# EAGLE board V0p2_Main_PCB2 (EAGLE 7.1.0)
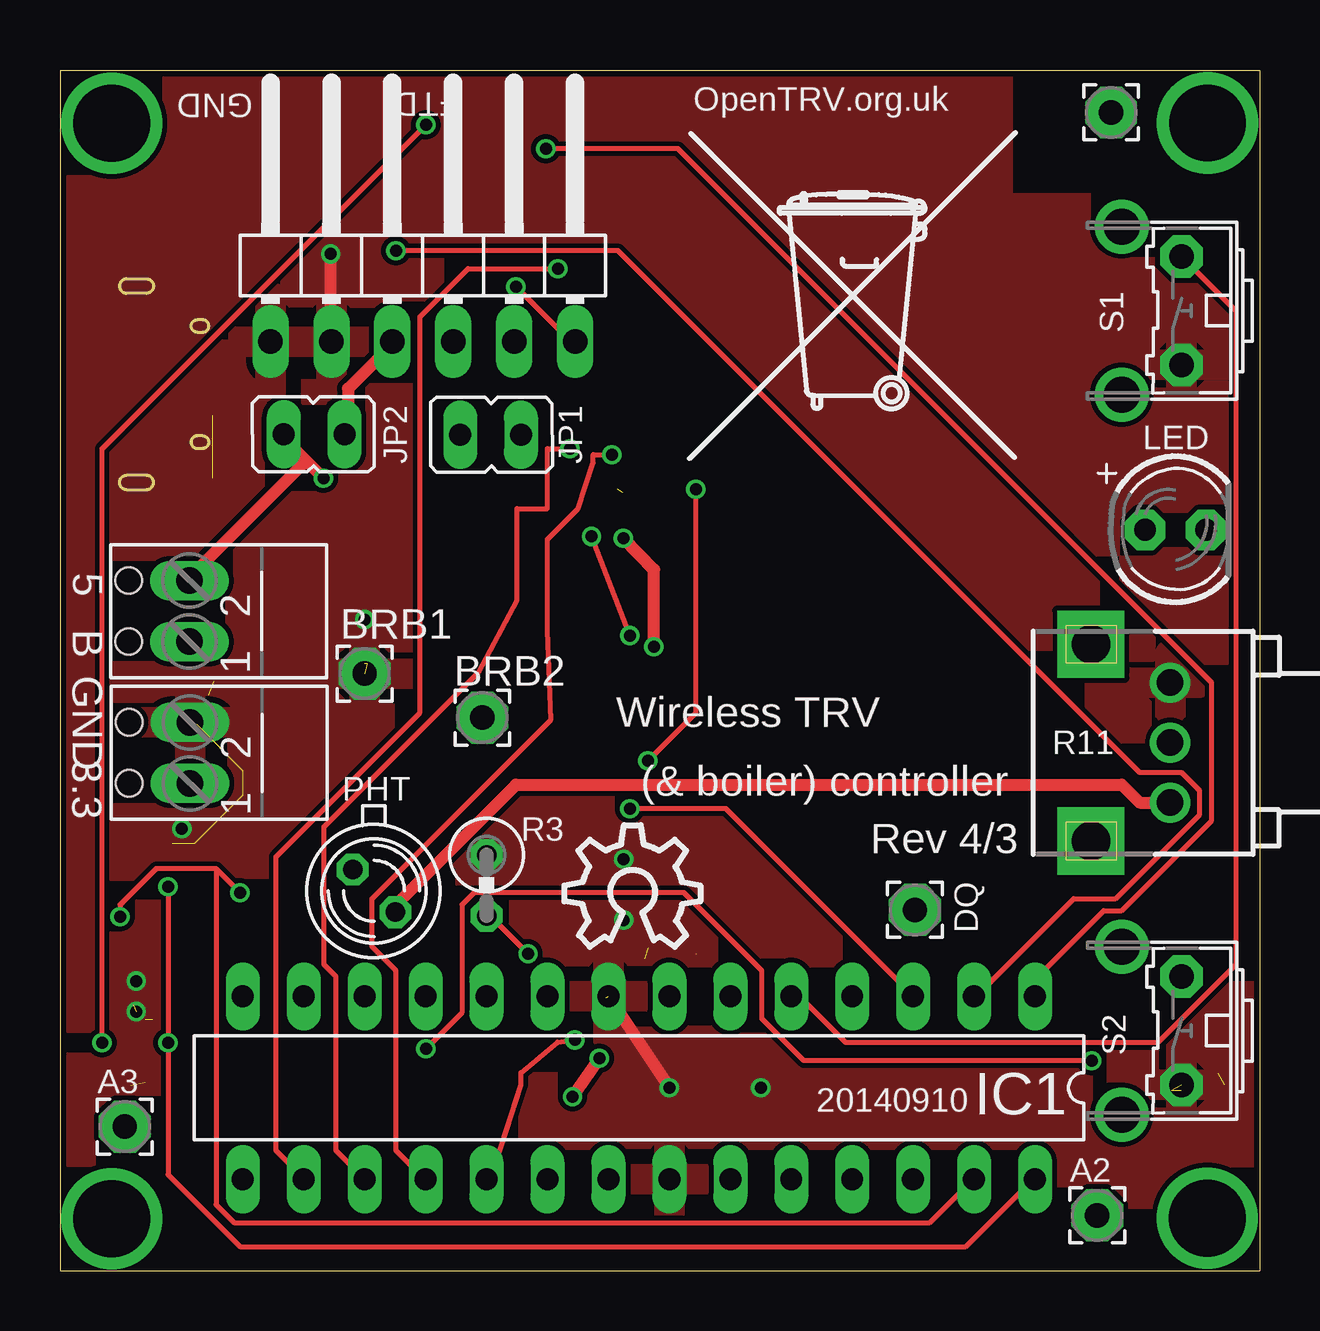
[diagram p0: board, top side]
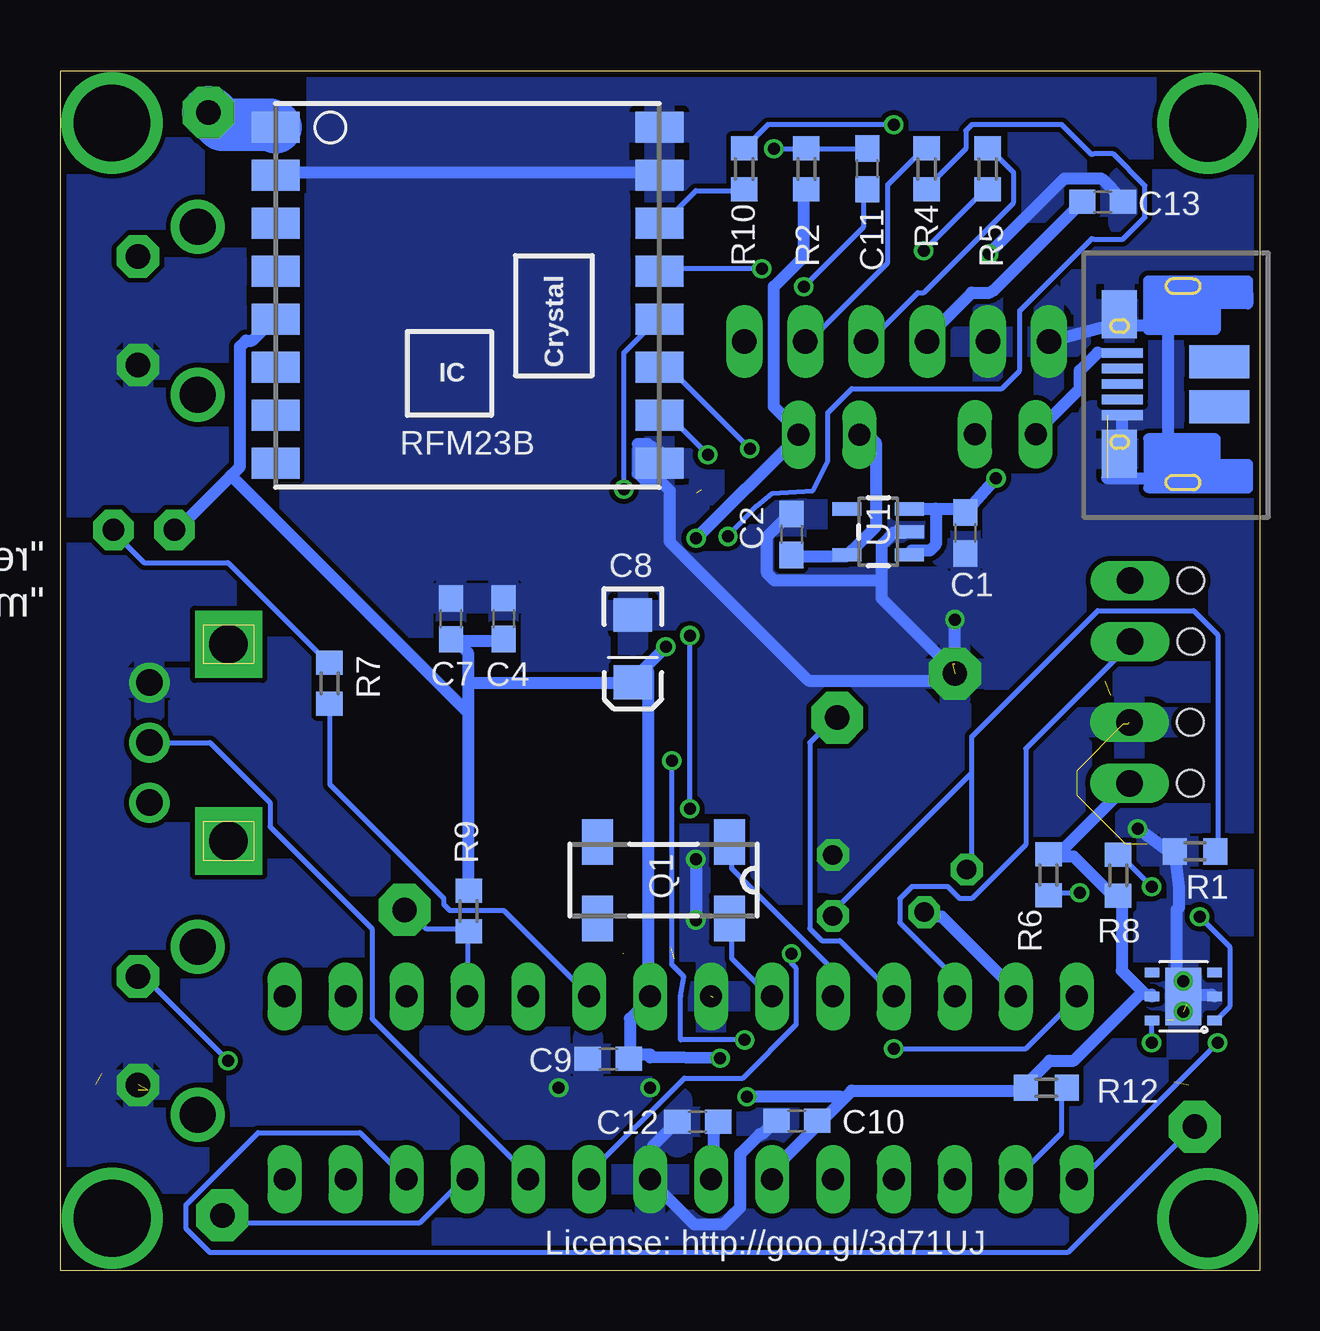
[diagram p1: board, bottom side, seen from below]

Size 50 x 50 mm. Coordinates in mm from the lower left corner, seen from the top.
Outline: 0,0 50,0 50,50 0,50 0,0
Copper layers (1*16): Top 0.035mm / dielectric 1.5mm / Bottom 0.035mm
Design rules "PMServicesStd *": minimum track width 8mil, minimum drill 0.5mm, track to track 8mil, track to pad 8mil, pad to pad 8mil, via to via 8mil, smd to smd 0mil, copper to edge 10mil, drill to drill 10mil, minimum pad ring 10mil, minimum via ring 6mil, stop-mask expansion 2mil, vias tented up to drill 100mil, thermal gap 10mil
Net classes: 0 default: width 0.203 mm; 1 supply: width 0.5 mm, clearance 0.203 mm; 2 ant: width 2.184 mm

## Footprints (pad centres in the part's own frame; a part is rotated, then mirrored left to right if it is on the bottom)
2,15/1,0 = drill 1.016 pad 2.159 octagon: 1 0,0
C0603 = smd 1.1 x 1: 1 -0.85,0; 2 0.85,0
EIA3216 = smd 1.4 x 1.6: A 1.4,0; C -1.4,0
1X06/90 = drill 1.016 long: 1 -6.35,-3.81; 2 -3.81,-3.81; 3 -1.27,-3.81; 4 1.27,-3.81; 5 3.81,-3.81; 6 6.35,-3.81
DIL28-3 = drill 0.914 long: 1 -16.51,-3.81; 2 -13.97,-3.81; 3 -11.43,-3.81; 4 -8.89,-3.81; 5 -6.35,-3.81; 6 -3.81,-3.81; 7 -1.27,-3.81; 8 1.27,-3.81; 9 3.81,-3.81; 10 6.35,-3.81; 11 8.89,-3.81; 12 11.43,-3.81; 13 13.97,-3.81; 14 16.51,-3.81; 15 16.51,3.81; 16 13.97,3.81; 17 11.43,3.81; 18 8.89,3.81; 19 6.35,3.81; 20 3.81,3.81; 21 1.27,3.81; 22 -1.27,3.81; 23 -3.81,3.81; 24 -6.35,3.81; 25 -8.89,3.81; 26 -11.43,3.81; 27 -13.97,3.81; 28 -16.51,3.81
JP1 = drill 0.914 long: 1 0,-1.27; 2 0,1.27
LED3MM = drill 0.914 pad 1.676 octagon: A -1.27,0; K 1.27,0
BPX65 = drill 0.813 octagon: A -0.889,-0.889; K 0.889,0.889
MC-306 = smd 1.3 x 1.9: 1 -2.75,-1.6; 2 2.75,-1.6; 3 2.75,1.6; 4 -2.75,1.6
R0603 = smd 1 x 1.1: 1 -0.85,0; 2 0.85,0
0309V = drill 0.813 octagon: 1 -1.27,0; 2 1.27,0
EVUE = drill 1.1 pad 1.676: 1 0,-2.5; 2 0,0; 3 0,2.5 | drill 1.6 pad 2.8 square: M1 -3.3,4.1; M2 -3.3,-4.1
RFM23-XXX-S1 = smd 2 x 1.3: 1 -8,7; 2 -8,5; 3 -8,3; 4 -8,1; 5 -8,-1; 6 -8,-3; 7 -8,-5; 8 -8,-7; 9 8,-7; 10 8,-5; 11 8,-3; 12 8,-1; 13 8,1; 14 8,3; 15 8,5; 16 8,7
B3F-31XX = drill 1.016 pad 1.778 octagon: 1 -2.261,-1.245; 2 2.261,-1.245 | drill 1.499 pad 2.032: 3 -3.505,1.245; 4 3.505,1.245
TC1185 = smd 0.55 x 1.2: 1 -0.95,-1.3; 2 0,-1.3; 3 0.95,-1.3; 4 0.95,1.3; 5 -0.95,1.3
SHT21 = smd 0.4 x 0.6: 1 -1,-1.3; 2 0,-1.3; 3 1,-1.3; 4 1,1.3; 5 0,1.3; 6 -1,1.3 | smd 2.4 x 1.5: P$1 0,0
MICRO-USB-FCI-10103592 = smd 0.4 x 1.71: 1 3.84,2.51; 2 3.19,2.51; 3 2.54,2.51; 4 1.89,2.51; 5 1.24,2.51 | smd 2 x 1.46: 7 -0.36,2.64; 17 5.44,2.64 | smd 1.375 x 2.5: 11 1.603,-1.52; 12 3.478,-1.52
SCREWTERMINAL = drill 1.1 long: 1 -1.27,-1.27; 2 1.27,-1.27 | hole 1.1: -1.27,1.27; 1.27,1.27

## Placement (x,y rotation side)
A2  [2,15/1,0]  43.23,2.31 0 top
A3  [2,15/1,0]  2.7,6 0 top
ANT1  ANT (86 mm)  [2,15/1,0]  43.81,48.26 0 top
BRB1  BRB1  [2,15/1,0]  12.7,24.87 0 top
BRB2  BRB2  [2,15/1,0]  17.6,23.04 180 top
C1  10uF 10V  [C0603]  12.27,30.74 270 bottom
C2  10uF 10V  [C0603]  19.51,30.68 270 bottom
C4  100pF  [C0603]  31.51,27.17 270 bottom
C7  100nF  [C0603]  33.7,27.16 90 bottom
C8  100uF  [EIA3216]  26.12,25.92 270 bottom
C9  100nF  [C0603]  27.15,8.82 180 bottom
C10  100nF  [C0603]  19.28,6.24 180 bottom
C11  100nF  [C0603]  16.35,45.91 270 bottom
C12  100nF  [C0603]  23.42,6.21 180 bottom
C13  10uF 10V  [C0603]  6.54,44.54 180 bottom
DQ  [2,15/1,0]  35.64,15.03 0 top
FTDI  [1X06/90]  15.12,42.52 0 top
IC1  ATmega328P-PU  [DIL28-3]  24.13,7.62 180 top
JP1  [JP1]  17.95,34.83 270 top
JP2  [JP1]  10.59,34.85 90 top
LED  [LED3MM]  46.5,30.86 0 top
PHT  BPX65  [BPX65]  13.09,15.82 270 top
Q1  32768Hz  [MC-306]  24.84,16.27 180 bottom
R1  220K  [R0603]  2.68,17.47 180 bottom
R2  4.7K  [R0603]  18.89,45.91 90 bottom
R3  [0309V]  17.78,16.05 270 top
R4  4.7K  [R0603]  13.87,45.91 90 bottom
R5  4.7K  [R0603]  11.33,45.91 90 bottom
R6  4.7K  [R0603]  8.79,16.49 270 bottom
R7  470R  [R0603]  38.77,24.47 90 bottom
R8  4.7K  [R0603]  5.89,16.47 270 bottom
R9  4.7K  [R0603]  32.96,14.99 90 bottom
R10  1K  [R0603]  21.48,45.91 270 bottom
R11  EVUE2A  [EVUE]  46.27,22 0 top
R12  4.7K  [R0603]  8.89,7.62 180 bottom
RFM23B  RFM23B  [RFM23-XXX-S1]  33.02,40.64 0 bottom
S1  [B3F-31XX]  45.5,40 90 top
S2  [B3F-31XX]  45.5,10 90 top
U1  TC1185SMD  [TC1185]  15.89,30.79 90 bottom
U$1  [OSHW_10X200_NOTEXT]  21.02,13.49 0 top
U$2  [TONNE]  32.88,37.88 0 top
U$4  SHT21  [SHT21]  3.17,11.43 90 bottom
USBPOWER  MICRO-USB-FCI-10103592  [MICRO-USB-FCI-10103592]  3.2,34.4 90 bottom
X1  [SCREWTERMINAL]  4.13,27.48 90 top
X2  [SCREWTERMINAL]  4.15,21.57 90 top

## Library data of the parts
A2 A3 ANT1 BRB1 BRB2 DQ = wirepad
C1 C2 C4 C7 C9-C13 R1-R10 R12 = resistor
C8 = SparkFun-Passives
FTDI = pinhead
IC1 = Arduino-AVR
JP1 JP2 = jumper
LED S1 S2 = adafruit
PHT = opto-trans-siemens; MPN: BPX65.; OC_FARNELL: 327451; OC_NEWARK: 06WX2764
Q1 = crystal; MPN: MC-306 60.0KHZ 100PPM ,12.5PF; OC_FARNELL: 1278040; OC_NEWARK: 31M5576
R11 = pot
RFM23B = SparkFun-RF
U1 = 3.3VREG
U$1 = ohw-logo
U$2 = logo
U$4 = SHT21
USBPOWER = micro-usb-fci-10103592
X1 X2 = screwterminal; MPN: 237-102; OC_FARNELL: unknown; OC_NEWARK: 70K9898

## Nets
5V [supply]: C1.1 JP2.2 U1.1 U1.3 USBPOWER.1 X1.2
AI1: IC1.24 R11.2
BOILER: IC1.12 X1.1
BUTTON_LEARN2_L: IC1.5 S1.2
BUTTON_LEARN_L: IC1.14 S2.2
BUTTON_MODE_L: BRB2.1 IC1.11
D2: DQ.1 IC1.4 R9.1
GND [supply]: BRB1.1 C1.2 C2.1 C4.1 C7.2 C8.C C9.2 C10.2 C12.2 C13.1 FTDI.1 FTDI.2 IC1.8 IC1.22 R1.2 R3.1 R11.3 RFM23B.2 RFM23B.9 RFM23B.15 RFM23B.16 S1.1 S2.1 U1.2 U$4.2 U$4.P$1 USBPOWER.5 USBPOWER.7 USBPOWER.17 X2.2
IO_POWER_UP [supply]: IC1.13 PHT.K R11.1
LDR: IC1.23 PHT.A R1.1 R3.2
LED_HEATCALL_L: IC1.6 R7.1
N$1: C11.2 FTDI.6
N$3: FTDI.4 R5.2
N$5: FTDI.5 R4.2
N$6 [supply]: C12.1 IC1.21
N$7: R10.2 RFM23B.14
N$8 [supply]: C2.2 JP1.1 U1.5
N$11 [supply]: C13.2 FTDI.3 JP2.1
N$13: LED.K R7.2
N$24: A2.1 IC1.25
N$25: A3.1 IC1.26
N$31 [ant]: ANT1.1 RFM23B.1
RESET: C11.1 IC1.1 R2.2
RFM_IRQ: IC1.15 R10.1
RX: IC1.3 R4.1
SCL: IC1.28 R8.1 U$4.6
SDA: IC1.27 R6.2 U$4.1
SPI_MISO: IC1.18 RFM23B.10
SPI_MOSI: IC1.17 RFM23B.11
SPI_NSS: IC1.16 R12.1 RFM23B.13
SPI_SCK: IC1.19 RFM23B.12
TX: IC1.2 R5.1
VCC [supply]: C4.2 C7.1 C8.A C9.1 C10.1 IC1.7 IC1.20 JP1.2 LED.A R2.1 R6.1 R8.2 R9.2 R12.2 RFM23B.5 U$4.5 X2.1
XTAL1: IC1.9 Q1.4
XTAL2: IC1.10 Q1.1

## Tracks (layer width: path | path; a pad name or v marks a point on that pad's centre or on a via)
5V  (via drill 0.5)
  Top 0.5: 10.25,33.75 9.25,34.75 JP2.2 | 10.25,33.75 v10.98,33.02 | 10.25,33.75 5.5,29 X1.2
  Bottom 0.4: 6.75,38.25 5.75,38.25 USBPOWER.1
  Bottom 0.5: 13.5,31.75 14.5,31.75 U1.3 | 13.5,31.75 12.5,31.75 C1.1 v10.98,33.02 | 13.5,31.75 13.5,30.25 13.75,30 14.5,30 U1.1 | 6.75,38.25 7.5,37.5 7.5,36.75 9.25,35 JP2.2
AI1
  Bottom 0.203: R11.2 43.75,22 41.25,19.5 41.25,18.5 37,14.25 37,10.5 30.5,4 IC1.24
BOILER
  Bottom 0.203: IC1.12 12.75,11.5 12.75,12.25 15,14.5 15,15.5 14.5,16 13,16 12.5,15.5 12,15.5 9.75,17.75 9.75,21.75 5.5,26 X1.1
BUTTON_LEARN2_L
  Top 0.203: IC1.5 30.5,11.25 31,11.25 32.75,9.5 45.75,9.5 49,12.75 49,40 S1.2
BUTTON_LEARN_L  (via drill 0.5)
  Top 0.203: v15.25,9.25 16.75,10.75 16.75,15.25 17.25,15.75 26,15.75 29.25,12.5 29.25,10.5 31,8.75 v43,8.75
  Bottom 0.203: v15.25,9.25 9.75,9.25 7.75,11.25 IC1.14 | v43,8.75 46.5,12.25 S2.2
BUTTON_MODE_L
  Bottom 0.203: IC1.11 15.25,11.5 17.5,13.75 18.25,13.75 18.75,14.25 18.75,22 17.75,23 BRB2.1
D2
  Bottom 0.203: IC1.4 33,11.5 33,14 R9.1 33,14.25 34.75,14.25 35.5,15 DQ.1
GND  (via drill 0.5)  (21 unrouted)
  Top 0.5: 25.3,7.72 25.33,7.75 | v11.28,42.37 11.28,38.71 FTDI.2 | 22.86,11.48 IC1.8 | 22.86,11.79 IC1.8 | IC1.8 v25.4,7.62
  Bottom 0.4: 5.75,35.5 USBPOWER.5
  Bottom 0.406: USBPOWER.5 6.35,35.64
  Bottom 0.5: 41.25,45.75 RFM23B.2 41,45.75 25.25,45.75 RFM23B.15 | U$4.2 2,11.5 3,11.5 U$4.P$1 | 5.75,35.5 5.75,34.25 USBPOWER.7 | 15.75,28.75 15.75,28 12.75,25 BRB1.1 | 15.75,28.75 15.75,30.25 15.25,30.75 14.75,30.75 U1.2 | 6.35,33.02 3.81,33.02 3.81,39.37 5.84,39.37 | 5.84,39.37 USBPOWER.17 | C10.2 20.22,6.2 20.73,5.69 20.83,5.69 21.64,4.88 21.64,2.64 22.35,1.93 23.57,1.93 25.4,3.76 IC1.22 25.3,3.96 25.3,5.18 24.28,6.2 C12.2 | 15.75,28.75 20.22,28.75 20.52,29.06 20.52,30.58 19.61,31.5 C2.1 | v11.28,42.37 8.13,45.52 6.6,45.52 5.69,44.6 C13.1 | 5.84,39.37 6.23,39.37 FTDI.1 | U$4.P$1 3.25,12.09 3.45,12.29 3.45,15.04 3.35,15.14 3.35,15.95 R1.2 3.81,17.47 v5.08,18.41 | v12.7,27.13 12.7,25.4 12.39,25.09 12.39,24.79 12.6,24.59 18.8,24.59 24.59,30.38 24.59,32.51 24.99,32.92 25.6,32.92 25.91,33.22 25.91,34.44 25.5,34.44 25.02,34.15 | 3.15,11.48 U$4.P$1 | v23.5,17.14 v23.5,14.61 | 25.09,33.63 RFM23B.9 25.09,33.63
  other vias: 3.17,10.79 3.17,12.06 29.21,7.62
  pour Bottom: 0,0 50,0 50,50 44.6,50 44.6,44.28 39.09,44.27 39.09,50 0,50
  pour Top: 0,50 0,0 50,0 50,50 44.6,50 44.6,44.28 39.09,44.27 39.09,50
IO_POWER_UP
  Top 0.5: R11.1 45,19.5 44.25,20.25 19,20.25 13.75,15 PHT.K
  Bottom 0.5: PHT.K 13.75,14.75 13.25,14.75 10,11.5 IC1.13
LDR  (via drill 0.5)
  Top 0.203: v19.51,13.21 18.29,14.43 18.19,14.43 17.88,14.73 R3.2
  Bottom 0.203: 12,20.75 12,16.75 PHT.A | 12,20.75 12,22.25 6.75,27.5 2.75,27.5 1.75,26.5 1.75,17.68 1.98,17.68 R1.1 | 12,20.75 17.75,15 R3.2 | v19.51,13.21 19.51,12.8 19.3,12.6 19.3,10.26 21.54,8.03 23.98,8.03 27.94,4.06 IC1.23
LED_HEATCALL_L
  Bottom 0.203: R7.1 38.75,23.5 38.75,20.25 34,15.5 34,15.25 33.75,15 31.5,15 28,11.5 IC1.6
N$1  (via drill 0.5)
  Top 0.203: v19,41 21.25,38.75 FTDI.6
  Bottom 0.203: v19,41 16.5,43.5 16.5,45 C11.2
N$3
  Bottom 0.203: R5.2 11.25,46.75 10.25,45.75 10.25,44.5 14,40.75 14.25,40.75 16.25,38.75 FTDI.4
N$4  (via drill 3.2)
  other vias: 2.16,47.81
N$5
  Bottom 0.203: R4.2 14,46.75 15.5,45.25 15.5,42 18.75,38.75 FTDI.5
N$6
  Bottom 0.5: C12.1 22.75,6 22.75,4 IC1.21
N$7
  Bottom 0.203: R10.2 21.5,45 23.5,45 25,43.5 RFM23B.14
N$8
  Bottom 0.5: C2.2 19.5,29.75 17.25,29.75 U1.5 17,30 16,31 16,34.5 16.5,35 JP1.1
N$11
  Top 0.5: JP2.1 12,35 12,36.75 13.75,38.5 FTDI.3
  Bottom 0.5: FTDI.3 14,38.75 12,40.75 11.25,40.75 11.07,40.84 7.42,44.5 C13.2
N$12  (via drill 3.2)
  other vias: 47.83,2.19
N$13
  Bottom 0.203: R7.2 39,25.5 43,29.5 46.5,29.5 47.75,30.75 LED.K
N$19  (via drill 3.2)
  other vias: 47.83,47.82
N$22  (via drill 3.2)
  other vias: 2.16,2.16
N$24
  Bottom 0.203: IC1.25 33.25,3.75 35,2 42.75,2 43,2.25 A2.1
N$25
  Bottom 0.203: IC1.26 37.5,5.75 41.75,5.75 44.75,2.75 44.75,1.75 43.75,0.75 8,0.75 2.75,6 A3.1
N$31
  Bottom 2.184: RFM23B.1 41.25,47.75 43.25,47.75 43.75,48.25 ANT1.1
RESET  (via drill 0.5)
  Top 0.203: v20.25,46.75 25.75,46.75 48,24.5 48,18.75 44.25,15 43.5,15 40.75,12.25 40.75,11.5 IC1.1
  Bottom 0.203: C11.1 16.5,46.75 18.75,46.75 R2.2 19,46.75 v20.25,46.75
RFM_IRQ  (via drill 0.5)
  Top 0.203: v15.25,47.75 1.75,34.25 v1.75,9.5
  Bottom 0.203: v15.25,47.75 20.5,47.75 21.25,47 R10.1 | v1.75,9.5 7.5,3.75 IC1.15
RX  (via drill 0.5)
  Top 0.203: v23.75,26.46 v22.16,30.59 | v23.75,19.25 27.75,19.25 35.5,11.5 IC1.3
  Bottom 0.203: v22.16,30.59 20.95,31.86 20.32,32.38 18.61,32.5 18,33.75 18,35.75 17,36.75 10.75,36.75 10,37.5 10,40 7,43 6.91,42.98 5.69,42.98 4.78,43.89 4.78,45.21 6.1,46.53 6.91,46.53 7,46.5 8.25,47.75 12,47.75 12.25,47.5 12.25,46.75 13.75,45.25 R4.1 | v23.75,19.25 v23.75,26.46
SCL  (via drill 0.5)
  Top 0.203: v4.5,16 v4.5,9.5 4.5,4 7.5,1 37.75,1 40.5,3.75 IC1.28
  Bottom 0.203: v4.5,9.5 4.5,10.25 U$4.6 | v4.5,16 5.75,17.25 R8.1
SDA  (via drill 0.5)
  Top 0.203: v2.5,14.75 2.5,15.25 4,16.75 6.5,16.75 | v7.5,15.75 6.5,16.75 | 6.5,16.75 6.5,2.75 7.25,2 36.25,2 38,3.75 IC1.27
  Bottom 0.203: v2.5,14.75 1.25,13.5 1.25,11 1.75,10.5 U$4.1 | v7.5,15.75 8.75,15.75 R6.2
SPI_MISO  (via drill 0.5)
  Top 0.203: v23,34 22.23,34 22.23,33.66 21.59,31.75 20.32,30.48 20.32,26.67 20.46,22.96 13,15.5 13,13.5 14,12.5 14,5 15,4 IC1.18
  Bottom 0.203: v23,34 24.5,35.5 25,35.5 RFM23B.10
SPI_MOSI  (via drill 0.5)
  Top 0.203: v21.25,34.25 20.32,34.25 20.32,31.75 19.05,31.75 19.05,27.94 17.44,24.94 11,18.5 11,12.75 11.5,12.25 11.5,5 12.5,4 IC1.17
  Bottom 0.203: v21.25,34.25 24.5,37.5 25,37.5 RFM23B.11
SPI_NSS  (via drill 0.5)
  Top 0.203: v20.75,41.75 17,41.75 15,39.75 15,23.25 9,17.25 9,5 10,4 IC1.16
  Bottom 0.203: R12.1 8.25,7.5 8.25,5.75 10,4 IC1.16 | v20.75,41.75 25,41.75 RFM23B.13
SPI_SCK  (via drill 0.5)
  Top 0.203: v26.5,32.56 26.5,23.25 v24.5,21.25 | v21.46,9.62 20.73,9.52 19.21,8.25 19.21,7.75 18,4 IC1.19
  Bottom 0.203: v26.5,32.56 26.5,38.25 25.25,39.5 RFM23B.12 | v24.5,21.25 24.5,12.75 24,12.25 24.13,11.43 24.13,9.62 v21.46,9.62
TX  (via drill 0.5)
  Top 0.203: v14,42.5 23.25,42.5 45,20.75 46.75,20.75 47.5,20 47.5,19 44,15.5 42.25,15.5 38.25,11.5 IC1.2
  Bottom 0.203: v14,42.5 11.5,45 R5.1
VCC  (via drill 0.5)
  Top 0.5: v21.36,7.25 v22.48,8.85 | v24.75,26 24.77,26 24.77,29.21 v23.48,30.52
  Bottom 0.5: 4.88,11.62 5.75,12.5 5.75,15.5 R8.2 6,15.5 7.75,17.25 8.5,17.25 | 4.88,11.62 4.75,11.5 4.5,11.5 U$4.5 | 8.5,17.25 8.75,17.25 R6.1 8.5,17.25 | 8.5,17.25 5.5,20.25 X2.1 | IC1.20 20.5,4 18.5,6 C10.1 18.25,6.25 17.38,7.12 | 17.38,7.12 17,7.5 9.75,7.5 R12.2 9.75,7.75 8.75,8.75 7.75,8.75 4.88,11.62 | v22.48,8.85 25.4,8.89 25.4,9 26,9 C9.1 26.25,9 26.25,10.5 25.5,11.25 IC1.7 25.5,11.5 25.5,25 C8.A | v21.36,7.25 17.5,7.25 17.38,7.12 | 42.88,33.12 45,31 LED.A | 42.88,33.12 42.5,33.5 42.5,38.5 42.25,38.75 42,38.75 41.25,39.5 RFM23B.5 | R2.1 19,45 19,42.25 20.25,41 20.25,36 19.25,35 JP1.2 19.25,34.75 v23.48,30.52 | 33,24.5 33,25.75 33.5,26.25 C7.1 33.25,26.25 31.75,26.25 C4.2 | 33,24.5 33,23.25 | 33,23.25 33,16 R9.2 | 33,24.5 26.25,24.5 C8.A | v24.75,26 26,24.75 C8.A | 33,23.25 42.88,33.12
XTAL1
  Bottom 0.203: Q1.4 22,14.5 22,13 20.5,11.5 IC1.9
XTAL2
  Bottom 0.203: Q1.1 22,17.75 22,16.75 18,12.75 18,11.5 IC1.10

## Text on the board
bPlace: License: http://goo.gl/3d71UJ
tNames: GND | OpenTRV.org.uk | 5 | B | GND | Wireless TRV | 3.3 | (& boiler) controller | Rev 4/3 | 20140910
bNames: "replace milling with slot drilling if rqd" / "min 2.1mm x 1.8mm"